# Allegro board WCSA_SystemSchem_2-Layer.brd
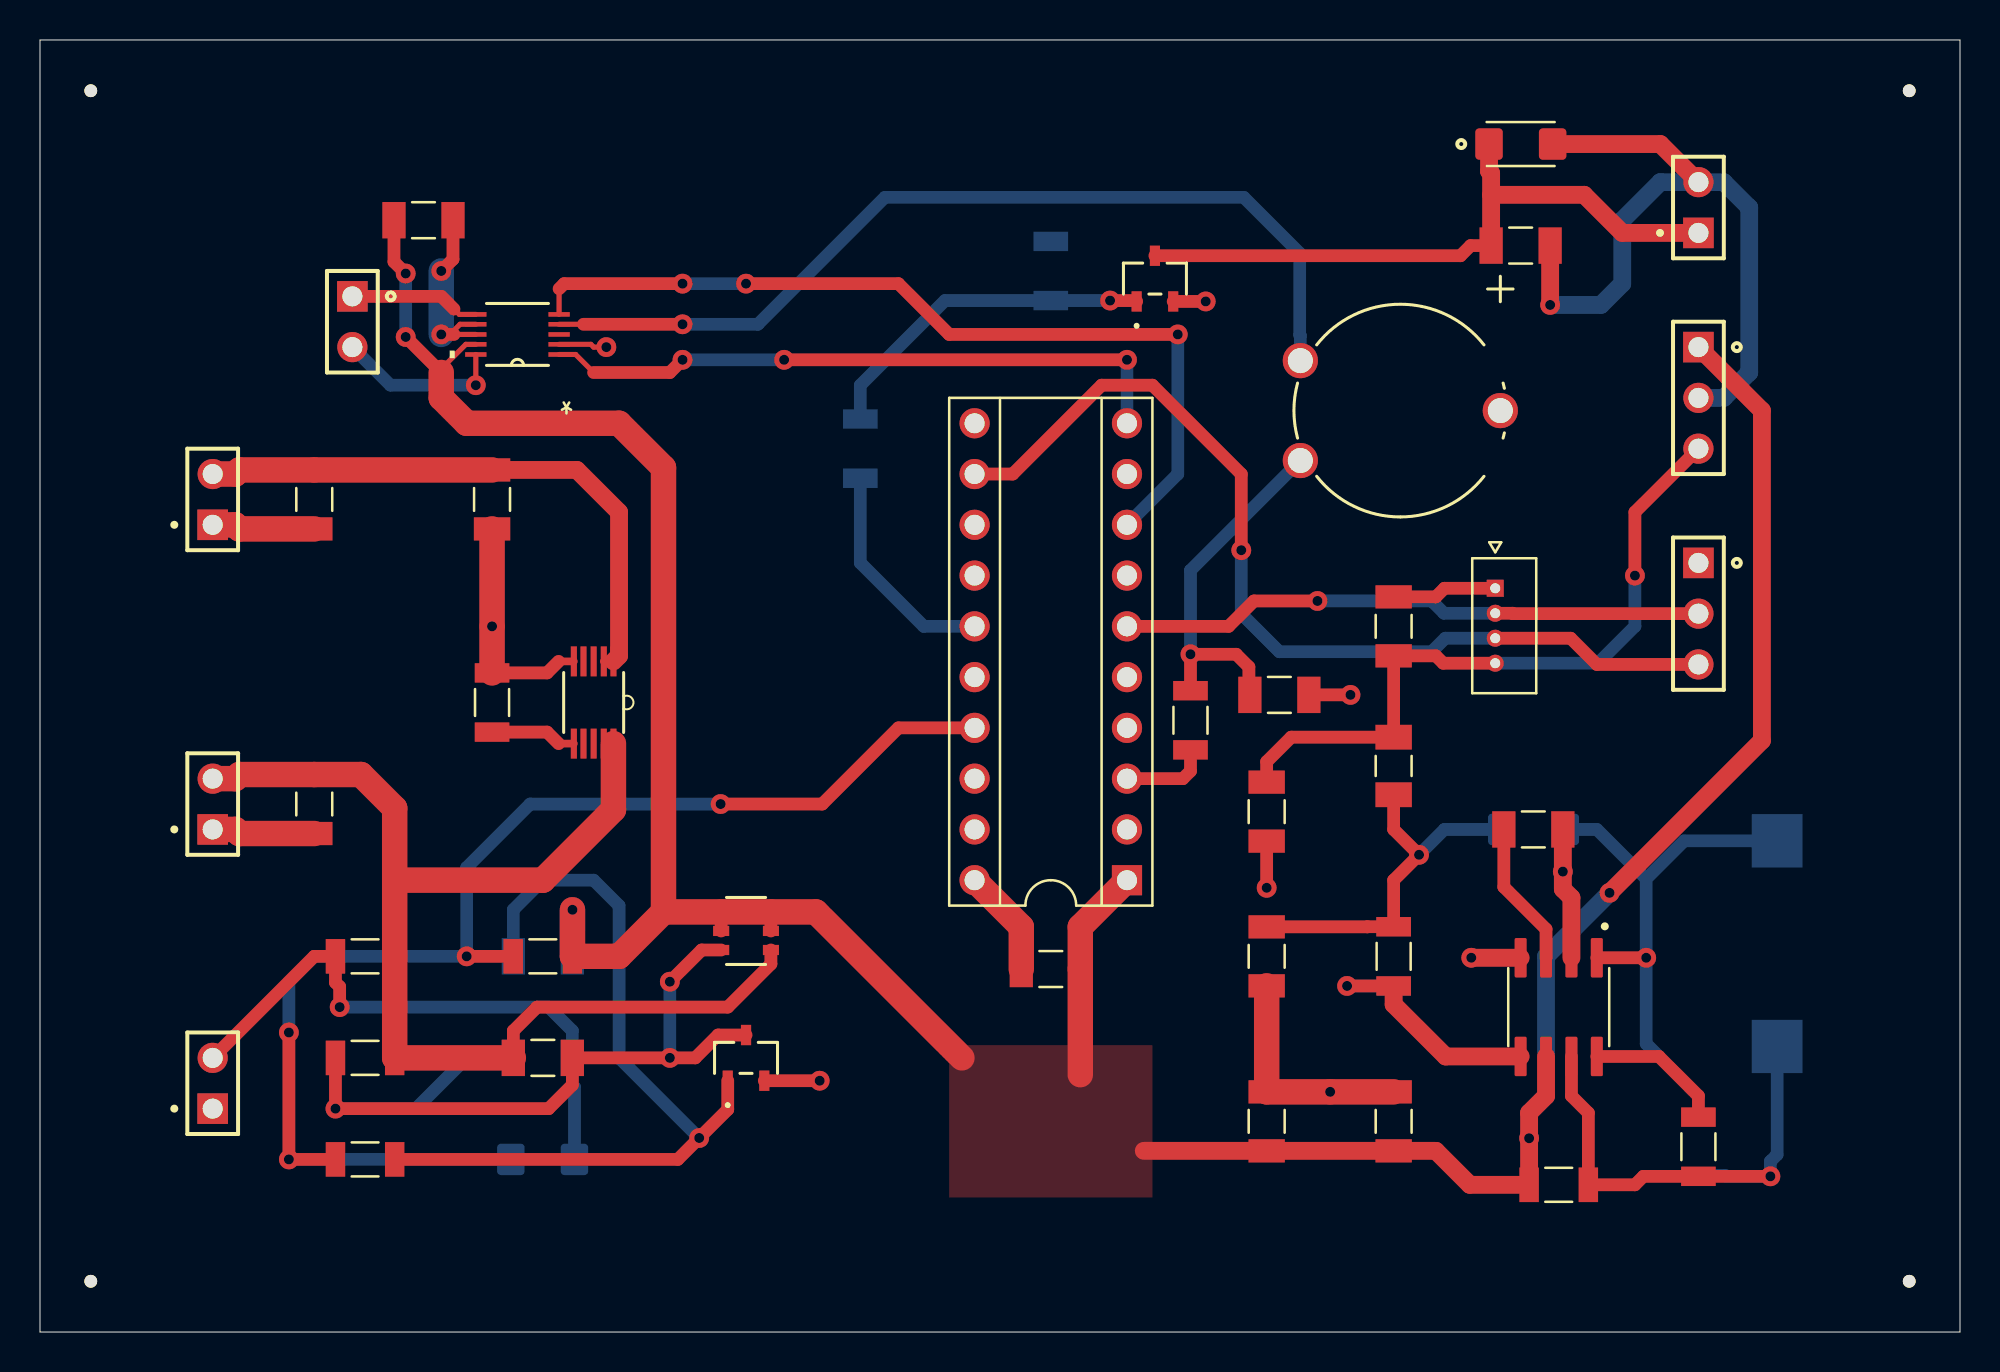
[diagram p0: board, top side]
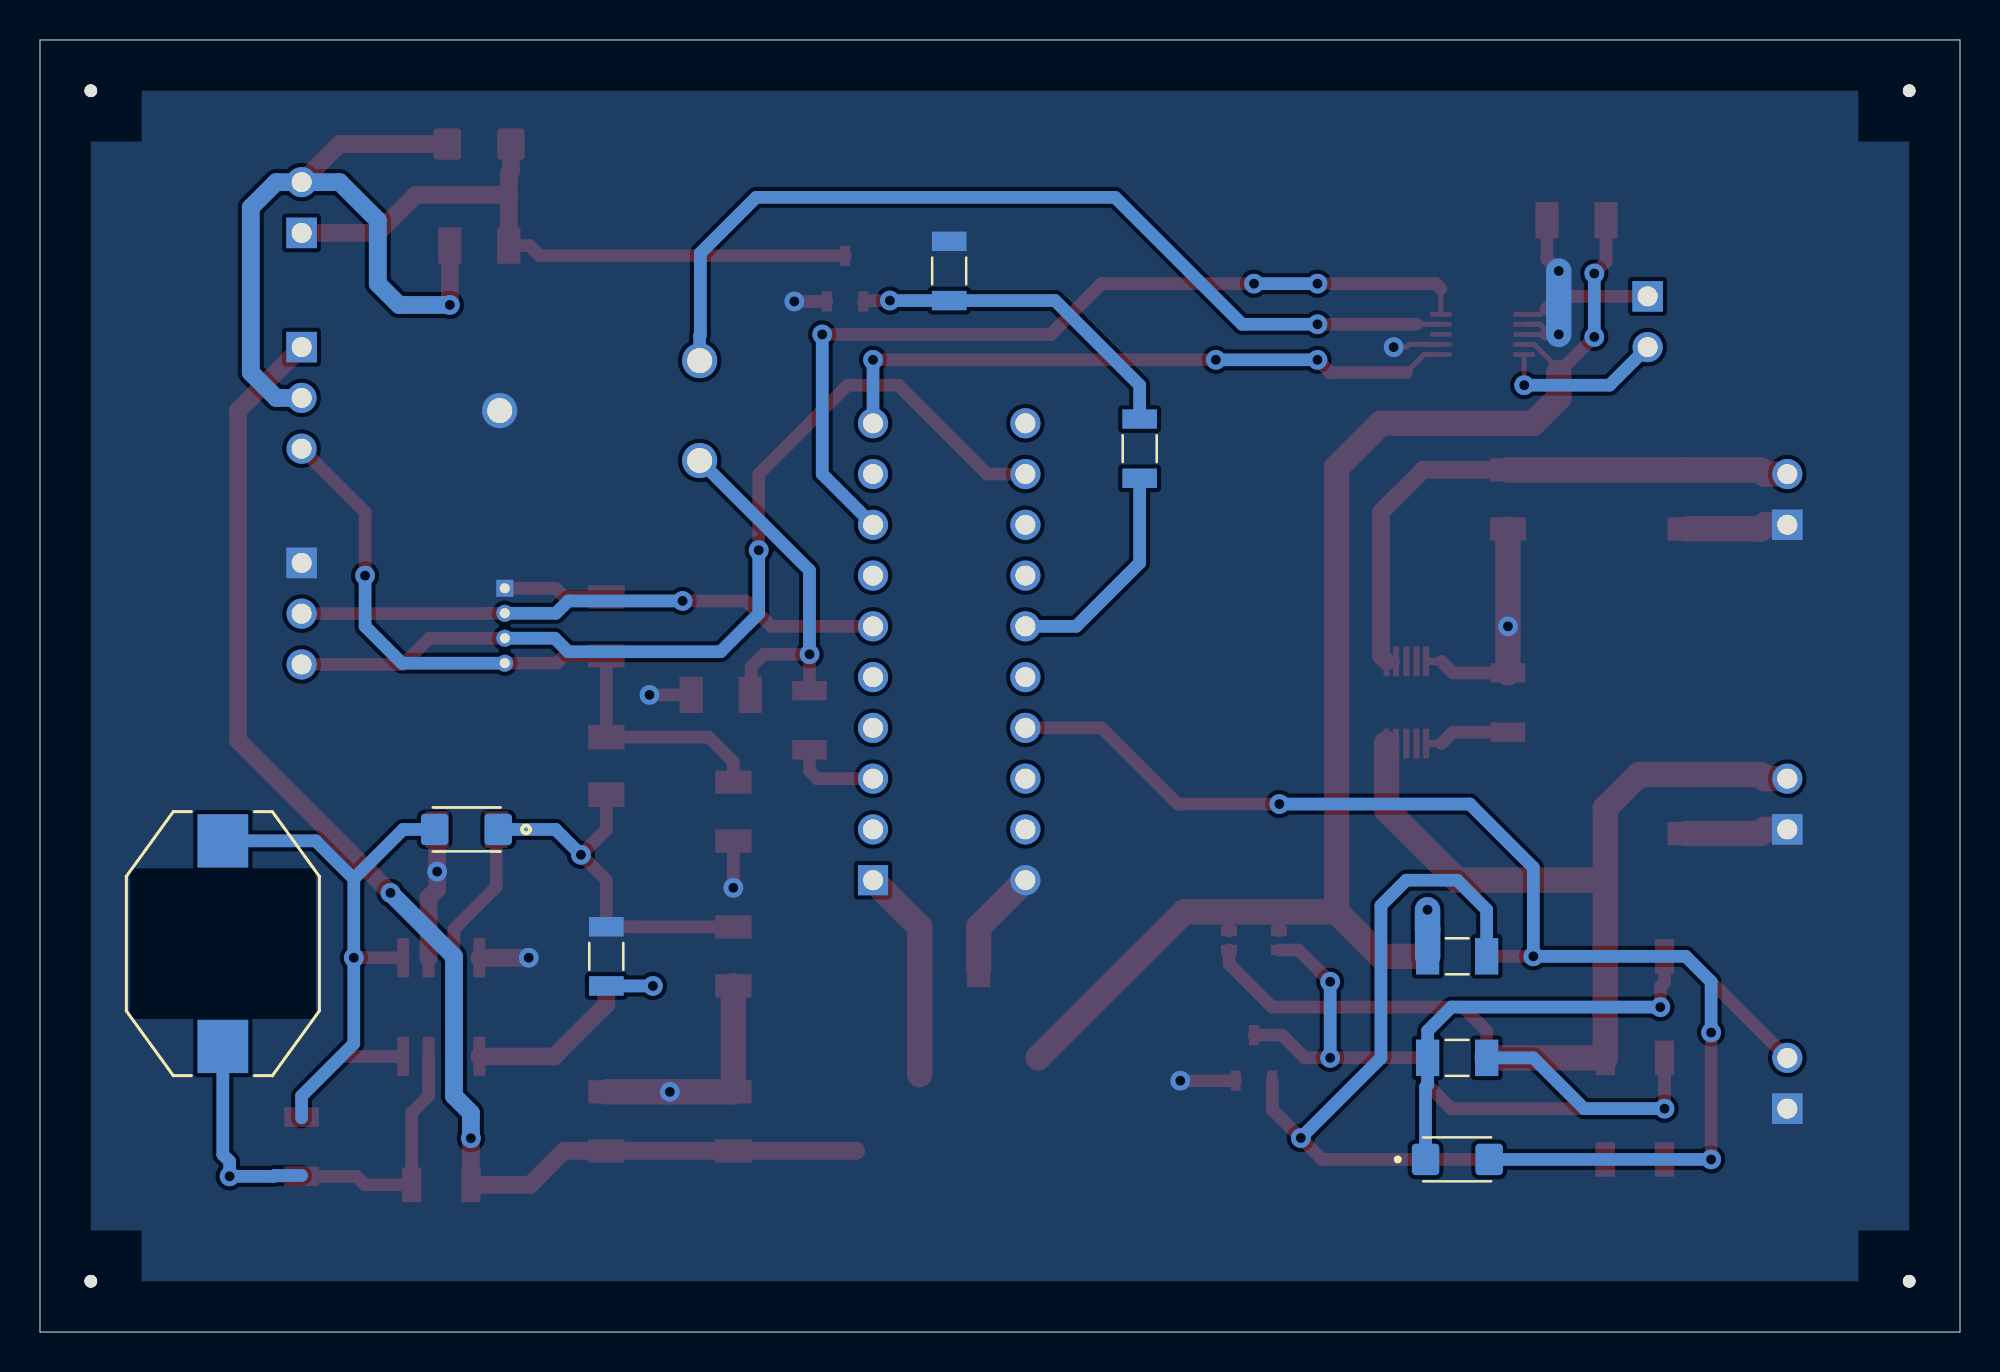
[diagram p1: board, bottom side, seen from below]

Outline 96.01 x 64.64 mm; copper layers: TOP, BOTTOM. Coordinates in mm from the lower left corner of the outline.
Outline path: 0,64.64 96.01,64.64 96.01,0 0,0 0,64.64

## Design rules (mm)
constraint set DEFAULT: min track width 0.305

## Placement (name value [footprint] x y rotation side)
C1  100n  [CAPC3216X110N]  50.55 18.16 0 top
C2  10u  [CAPC3216X110N]  13.72 41.66 270 top
C3  10u  [CAPC3216X110N]  13.72 26.42 270 top
C4  100u  [CAPC3216X110N]  61.34 10.54 90 top
C5  1500p  [CAPC3216X110N]  74.68 25.15 0 top
C6  330u  [CAPC3216X110N]  61.34 18.8 270 top
C7  100n  [CAPC3216X110N]  22.61 41.66 270 top
C8  100n  [CAPC3216X110N]  67.69 10.54 90 top
C9  100n  [CAPC3216X110N]  25.15 13.72 0 top
C10  2.2u  [CAPC3216X110N]  25.15 18.8 180 bottom
C11  1u  [CAPC3216X110N]  25.15 13.72 180 bottom
C12  100n  [CAPC3216X110N]  74.04 54.36 180 top
C13  100n  [CAPC3216X110N]  61.98 31.88 0 top
C14  100n  [CAPC3216X110N]  67.69 35.31 90 top
C15  100u  [CAPC3216X110N]  61.34 26.04 270 top
C16  100n  [CAPC3216X110N]  19.18 55.63 0 top
D1  1N4001  [DIOSC190X340X116-2N]  25.15 8.64 180 bottom
D2  1N5819  [DIOSC190X340X116-2N]  74.68 25.15 0 bottom
D3  1N5819  [DIOSC190X340X116-2N]  74.04 59.44 0 top
J1  PWR_IN  [SAMTEC_MTSW-101-08-S-D-315]  8.64 40.39 0 top
J2  3.7V Li+Po  [SAMTEC_MTSW-101-08-S-D-315]  8.64 25.15 0 top
J3  UART_Header  [SAMTEC_TSW-101-24-G-T]  82.93 38.48 180 top
J4  LiDAR Header  [MOLEX_530470410]  72.77 37.21 90 top
J5  Vibration_Motor  [SAMTEC_MTSW-101-08-S-D-315]  82.93 54.99 0 top
J6  Jumper: +[3.3/5]V  [SAMTEC_TSW-101-24-G-T]  82.93 49.28 180 top
J7  Speaker  [SAMTEC_MTSW-101-08-S-D-315]  15.62 51.82 180 top
L1  170uH  [IND_SMT_DO3316P_12P95X9P4_COC]  86.87 19.43 90 bottom
L2  1uH  [INDC3216X95N]  67.69 28.32 90 top
NOREF  -  [unnamed]  2.54 62.1 0 top
NOREF#2  -  [unnamed]  93.47 62.1 0 top
NOREF#3  -  [unnamed]  2.54 2.54 0 top
NOREF#4  -  [unnamed]  93.47 2.54 0 top
Q1  ZXMD63P02X/ZTX  [ZXM62P02E6TA_DIO]  35.31 20.07 0 top
Q2  ZXMD63N02X/ZTX  [SOT23_2P9X1P3_DIO]  35.31 13.72 0 top
Q3  ZXMD63N02X/ZTX  [SOT23_2P9X1P3_DIO]  55.75 52.7 0 top
R1  10k  [RESC3116X65N]  16.26 18.8 0 top
R2  100k  [RESC3116X65N]  16.26 13.72 0 top
R3  300k  [RESC3116X65N]  16.26 8.64 0 top
R4  100k  [RESC3116X65N]  25.15 18.8 0 top
R5  0.22  [RESC3116X65N]  75.95 7.37 0 top
R6  180  [RESC3116X65N]  82.93 9.27 270 top
R7  3.6k  [RESC3116X65N]  67.69 18.8 270 top
R8  1.2k  [RESC3116X65N]  67.69 18.8 270 bottom
R9  2k  [RESC3116X65N]  22.61 31.5 270 top
R10  1k  [RESC3116X65N]  41.02 44.2 270 bottom
R11  100k  [RESC3116X65N]  50.55 53.09 90 bottom
R12  4.7k  [RESC3116X65N]  57.53 30.61 270 top
R13  T100k  [TO_-102A2020-S_PHR]  73.03 46.1 270 top
SW1  Jump2  [SAMTEC_MTSW-101-08-S-D-315]  8.64 11.18 0 top
U1  PIC16F18345  [DIP-20-SOCKET]  50.55 34.04 90 top
U2  MCP7388T  [SOP50P490X110-10N]  27.69 31.5 270 top
U3  MC3x063A  [SOIC127P599X175-8N]  75.95 16.26 270 top
U4  LM4667  [MUB10A]  23.88 49.91 180 top

## Library data of the parts
C1-C16 = C1206C241MGGACAUTO7210_2
D1-D3 = 1N5819
J1 J2 J5 J7 SW1 = Jump2_0
J3 J6 = SIPSOC-3_1
J4 = SIPSOC-4_0
L1 = L: User Part Number: PN; Tolerance: TOL
L2 = L
Q1 = DIPSOC-3x2_1: User Part Number: PN; Tolerance: TOL
Q2 Q3 = ZXMD63N02X/ZTX: User Part Number: PN; Tolerance: TOL
R1-R12 = RC1206JR-0713RL
R13 = POT_2: User Part Number: PN; Tolerance: TOL
U1 = DIP-20_1
U2 = DIPSOC-5x2_2
U3 = MC3x063A_8
U4 = DIPSOC-5x2_3: User Part Number: PN; Tolerance: TOL

## Footprints (pads in the part's own frame, mm; a bottom-side part is the same pattern mirrored in y, then rotated)
CAPC3216X110N
  rect 1.161x1.819 smd: 1(-1.476,0) 2(1.476,0)
DIOSC190X340X116-2N
  custom 1.372x1.57 smd: 1(-1.58,0) 2(1.6,0)
DIP-20-SOCKET
  rect 1.509x1.509 hole 1.001: 1(-11.43,-3.81)
  round 1.509 hole 1.001: 2(-8.89,-3.81) 3(-6.35,-3.81) 4(-3.81,-3.81) 5(-1.27,-3.81) 6(1.27,-3.81) 7(3.81,-3.81) 8(6.35,-3.81) 9(8.89,-3.81) 10(11.43,-3.81) 11(11.43,3.81) 12(8.89,3.81) 13(6.35,3.81) 14(3.81,3.81) 15(1.27,3.81) 16(-1.27,3.81) 17(-3.81,3.81) 18(-6.35,3.81) 19(-8.89,3.81) 20(-11.43,3.81)
IND_SMT_DO3316P_12P95X9P4_COC
  rect 2.667x2.54 smd: 1(-5.144,0) 2(5.144,0)
INDC3216X95N
  rect 1.24x1.819 smd: 1(-1.44,0) 2(1.44,0)
MOLEX_530470410
  rect 0.851x0.851 hole 0.5: 1(0,0)
  round 0.851 hole 0.5: 2(-1.25,0) 3(-2.499,0) 4(-3.749,0)
MUB10A
  rect 1.067x0.229 smd: 1(-2.083,1.003) 2(-2.083,0.495) 3(-2.083,0) 4(-2.083,-0.508) 5(-2.083,-1.003) 6(2.083,-1.003) 7(2.083,-0.508) 8(2.083,0) 9(2.083,0.495) 10(2.083,1.003)
RESC3116X65N
  rect 0.97x1.73 smd: 1(-1.481,0) 2(1.481,0)
SAMTEC_MTSW-101-08-S-D-315
  rect 1.529x1.529 hole 1.001: 1(0,0)
  round 1.509 hole 1.001: 2(0,2.54)
SAMTEC_TSW-101-24-G-T
  rect 1.529x1.529 hole 1.001: 1(0,0)
  round 1.509 hole 1.001: 2(0,2.54) 3(0,5.08)
SOIC127P599X175-8N
  custom 1.971x0.599 smd: 1(-2.469,1.905) 2(-2.469,0.635) 3(-2.469,-0.635) 4(-2.469,-1.905) 5(2.469,-1.905) 6(2.469,-0.635) 7(2.469,0.635) 8(2.469,1.905)
SOP50P490X110-10N
  rect 1.499x0.305 smd: 1(-2.057,0.991) 2(-2.057,0.508) 3(-2.057,0) 4(-2.057,-0.508) 5(-2.057,-0.991) 6(2.057,-0.991) 7(2.057,-0.508) 8(2.057,0) 9(2.057,0.508) 10(2.057,0.991)
SOT23_2P9X1P3_DIO
  rect 0.508x1.016 smd: 1(0.914,-1.143) 2(-0.914,-1.143) 3(0,1.143)
TO_-102A2020-S_PHR
  round 1.758 hole 1.25: 1(0,0) 2(-2.499,-10) 3(2.499,-10)
unnamed
  round 0.635 hole 3.175 unplated: (0,0)
ZXM62P02E6TA_DIO
  rect 0.803x0.508 smd: 1(-1.245,0.953) 2(-1.245,0) 3(-1.245,-0.953) 4(1.245,-0.953) 5(1.245,0) 6(1.245,0.953)

## Nets
+5V: C14.1 C15.1 J4.4 J6.3 L2.2
GND: C1.1 C2.2 C3.2 C4.2 C5.2 C6.2 C7.2 C8.2 C13.2 C14.2 C15.2 C16.2 J1.1 J2.1 J3.1 J4.1 Q2.1(S) Q3.1(S) R8.1 R9.1 R11.2 R13.1 SW1.1 U1.20 U2.5(VSS) U3.2 U3.4 U4.2 U4.7 U4.8
VBAT: C3.1 C9.1 J2.2(PIN2) Q1.4(S) R1.2 R2.2 U2.9 U2.10
VDD: C1.2 C4.1 C8.1 C10.1 C16.1 J6.1 Q1.1 Q1.2 Q1.5 Q1.6 R4.2 R5.1 U1.1 U3.6(VCC) U4.9
RA2-CCP3: D1.2 R3.1 R4.1 U1.17
RA4-CCP4: R12.2 U1.3
RB5-RX: J3.3 J4.3 U1.12
RB7-SPKR_SD: U1.10 U4.1
RC1-PWM5: R10.2 U1.15
RC4-TX: J3.2 J4.2 U1.6
RC6-SPKR_G: U1.8 U4.5
VCHG: C2.1 C7.1 J1.2(PIN2) U2.1 U2.2
N11607: R9.2 U2.6
N12112: L1.1 R5.2 R6.2 U3.7
N12132: D2.2 L1.2 U3.1
N12244: C6.1 D2.1(CAT) L2.1 R7.1
N12286: R7.2 R8.2 U3.5
N14206: C5.1 U3.3
N88931: C9.2 C11.2 Q1.3 Q2.3 R2.1
N88985: C10.2 Q2.2 R3.2
N92811: C11.1 D1.1(CAT) R1.1 SW1.2(PIN2)
N99325: Q3.2 R10.1 R11.1
N99590: C12.2 D3.1(CAT) J5.1 Q3.3
N99769: C12.1 D3.2 J5.2(PIN2) J6.2
N102392: C13.1 R12.1 R13.3
N102677: R13.2(WIPER) U4.4
N102956: J7.2(PIN2) U4.10(VO2)
N102965: J7.1 U4.6
N121987: R6.1 U3.8

Pads without a net: U1 2 4 5 7 9 11 13 14 16 18 19; U2 3 4 7 8; U4 3

## Via types
v1: diameter 0.991, hole 0.5, TOP to BOTTOM, 43 vias

## Routing (per net, layer and track width the routed paths; a pad name or vN(x,y) marks a point on that pad's centre or on a via; arc(x,y) is an arc through that point)
+5V: length 35.1
  TOP w0.635: J6.3 79.76,41.02 v1(79.76,37.85) ; C15.1 61.34,28.53 62.57,29.76 L2.2 C14.1 69.8,33.83 70.17,33.46 J4.4
  BOTTOM w0.635: J4.4 77.91,33.46 79.76,35.31 v1(79.76,37.85)
GND: length 73.6
  TOP w0.254: v1(28.32,49.28) 27.69,49.28 27.55,49.42 U4.2 ; 21.79,49.91 20.7,49.91 20.7,50.11 21.01,50.42 21.79,50.42
  TOP w0.381: 25.93,33.55 U2.5
  TOP w0.635: J4.1 70.23,37.21 69.8,36.78 C14.2 ; R9.1 25.36,32.98 25.93,33.55 ; Q3.1 v1(58.29,51.56) ; Q2.1 v1(38.99,12.57) ; C13.2 v1(65.53,31.88) ; C15.2 v1(61.34,22.22) ; C16.2 20.65,53.67 v1(20.07,53.09) ; v1(20.07,49.91) 20.7,49.91
  TOP w0.889: C5.2 v1(76.15,23.04) 76.15,22.16 76.58,21.73 U3.2 ; U3.4 v1(71.57,18.72)
  TOP w1.27: J2.1 9.77,25.15 9.97,24.94 C3.2 ; C2.2 9.97,40.18 9.77,40.39 J1.1 ; R9.1 v1(22.61,35.31) C7.2 ; C1.1 49.07,20.27 U1.20 ; C6.2 C4.2 v1(64.52,12.02) C8.2
  BOTTOM w1.27: v1(20.07,49.91) v1(20.07,53.09)
VBAT: length 60.8
  TOP w0.254: U2.9 U2.10
  TOP w0.635: C9.1 23.67,15.07 24.86,16.26 34.39,16.26 36.55,18.41 Q1.4
  TOP w1.27: 17.74,22.61 17.74,26.21 16.05,27.89 C3.1 9.97,27.89 9.77,27.69 J2.2 ; 17.74,22.61 R1.2 R2.2 C9.1 ; 17.74,22.61 25.15,22.61 28.68,26.14 U2.10
VDD: length 160.2
  TOP w0.254: 20.07,48.01 20.07,48.19 21.3,49.42 U4.9
  TOP w0.635: Q1.6 Q1.5 ; C16.1 17.7,53.55 v1(18.29,52.96) ; 20.07,48.01 v1(18.29,49.78) ; Q1.2 Q1.1
  TOP w0.889: 55.2,9.07 C4.1 C8.1 69.8,9.07 71.5,7.37 R5.1 v1(74.47,9.7) 74.47,10.97 75.31,11.81 U3.6 ; J6.1 86.11,46.1 86.11,29.59 v1(78.49,21.97)
  TOP w1.27: U1.1 52.02,20.27 C1.2 52.02,12.88 ; v1(26.63,21.13) R4.2 28.96,18.8 31.18,21.02 ; 31.18,21.02 31.18,43.24 28.96,45.47 21.34,45.47 20.07,46.74 20.07,48.01 ; 31.18,21.02 Q1.1 Q1.6 38.8,21.02 46.1,13.72
  BOTTOM w0.635: v1(18.29,49.78) v1(18.29,52.96)
  BOTTOM w0.889: v1(74.47,9.7) 74.47,10.97 75.31,11.81 75.31,18.8 v1(78.49,21.97)
  BOTTOM w1.27: v1(26.63,21.13) 26.63,20.15 26.62,20.15 C10.1
RA2-CCP3: length 66.8
  TOP w0.635: R3.1 v1(12.45,8.64) v1(12.45,14.99) ; v1(34.04,26.42) 39.12,26.42 42.93,30.23 U1.17 ; v1(21.34,18.8) R4.1
  BOTTOM w0.635: v1(12.45,14.99) 12.45,17.53 13.72,18.8 v1(21.34,18.8) 21.34,23.24 24.51,26.42 v1(34.04,26.42) ; D1.2 v1(12.45,8.64)
RA4-CCP4: length 4.4
  TOP w0.635: U1.3 57.15,27.69 57.53,28.07 R12.2
RB5-RX: length 48.5
  TOP w0.635: U1.12 48.64,42.93 53.09,47.37 55.63,47.37 60.07,42.93 v1(60.07,39.12) ; 82.93,33.4 77.85,33.4 76.54,34.71 J4.3
  BOTTOM w0.635: v1(60.07,39.12) 60.07,35.94 61.98,34.04 69.6,34.04 70.27,34.71 J4.3
RB7-SPKR_SD: length 32.2
  TOP w0.254: U4.1 26.78,48.91 27.69,48.01
  TOP w0.635: v1(32.13,48.64) 31.5,48.01 27.69,48.01 ; v1(37.21,48.64) v1(54.36,48.64)
  BOTTOM w0.635: v1(32.13,48.64) v1(37.21,48.64) ; v1(54.36,48.64) U1.10
RC1-PWM5: length 11.3
  BOTTOM w0.635: R10.2 41.02,38.48 44.2,35.31 U1.15
RC4-TX: length 29.4
  TOP w0.635: J3.2 73.66,35.94 73.64,35.96 J4.2 ; U1.6 59.44,35.31 60.71,36.58 v1(63.88,36.58)
  BOTTOM w0.635: v1(63.88,36.58) 69.6,36.58 70.21,35.96 J4.2
RC6-SPKR_G: length 44
  TOP w0.254: U4.5 25.96,52.2
  TOP w0.635: v1(32.13,52.45) 26.21,52.45 25.96,52.2 ; v1(56.9,49.91) 45.47,49.91 42.93,52.45 v1(35.31,52.45)
  BOTTOM w0.635: U1.8 56.9,42.93 v1(56.9,49.91) ; v1(32.13,52.45) v1(35.31,52.45)
VCHG: length 29.3
  TOP w0.381: U2.1 U2.2
  TOP w0.889: U2.1 28.96,33.83 28.96,41.02 26.85,43.13 C7.1
  TOP w1.27: C7.1 C2.1 9.97,43.13 9.77,42.93 J1.2
N11607: length 4.3
  TOP w0.381: 25.93,29.44 U2.6
  TOP w0.635: R9.2 25.36,30.02 25.93,29.44
N12112: length 26.3
  TOP w0.635: v1(86.53,7.79) R6.2 80.18,7.79 79.76,7.37 R5.2 77.43,10.97 76.58,11.81 U3.7
  BOTTOM w0.635: L1.1 86.87,8.88 86.53,8.54 v1(86.53,7.79) 84.33,7.79 84.28,7.83 82.93,7.83
N12132: length 27.9
  TOP w0.635: U3.1 v1(80.32,18.72)
  BOTTOM w0.635: L1.2 82.22,24.57 80.32,22.68 ; D2.2 77.85,25.15 80.32,22.68 ; 80.32,22.68 v1(80.32,18.72) 80.32,14.42 82.93,11.81 82.93,10.71
N12244: length 18.7
  TOP w0.635: L2.1 67.69,25.15 v1(68.96,23.88) 67.69,22.61 R7.1 66.38,20.28 66.38,20.27 C6.1
  BOTTOM w0.635: v1(68.96,23.88) 70.23,25.15 D2.1
N12286: length 13
  TOP w0.635: R7.2 v1(65.36,17.32)
  TOP w0.889: U3.5 70.29,13.79 67.69,16.39 R7.2
  BOTTOM w0.635: v1(65.36,17.32) R7.2
N14206: length 7.3
  TOP w0.635: C5.1 73.2,22.27 75.31,20.15 U3.3
N88931: length 42.4
  TOP w0.635: Q1.3 33.08,19.11 v1(31.5,17.53) ; Q2.3 33.91,14.86 32.77,13.72 v1(31.5,13.72) C9.2 26.62,12.36 25.44,11.18 v1(14.78,11.18) R2.1
  BOTTOM w0.635: v1(14.78,11.18) 18.8,11.18 21.34,13.72 C11.2 ; v1(31.5,13.72) v1(31.5,17.53)
N88985: length 41.2
  TOP w0.635: Q2.2 34.39,11.13 v1(32.96,9.71) 31.89,8.64 R3.2
  BOTTOM w0.635: C10.2 23.67,21.13 25.15,22.61 27.69,22.61 28.96,21.34 28.96,13.72 v1(32.96,9.71)
N92811: length 29.5
  TOP w0.635: SW1.2 13.72,18.8 R1.1 14.78,17.49 14.99,17.28 v1(14.99,16.26)
  BOTTOM w0.635: v1(14.99,16.26) 25.44,16.26 26.62,15.07 C11.1 26.62,12.36 26.73,12.26 D1.1
N99325: length 17.3
  TOP w0.635: v1(53.51,51.61) 54.8,51.61 Q3.2
  BOTTOM w0.635: v1(53.51,51.61) R11.1 45.26,51.61 41.02,47.37 R10.1
N99590: length 33.3
  TOP w0.635: Q3.3 71.03,53.85 71.54,54.36 C12.2
  TOP w0.889: D3.1 72.46,58.08 72.57,57.98 72.57,56.9 ; 72.57,56.9 77.22,56.9 79.12,54.99 J5.1 ; 72.57,56.9 C12.2
N99769: length 37.3
  TOP w0.889: C12.1 v1(75.52,51.39) ; D3.2 81.03,59.44 J5.2
  BOTTOM w0.889: v1(75.52,51.39) 78.06,51.39 79.12,52.45 79.12,55.63 81.03,57.53 J5.2 84.2,57.53 85.47,56.26 85.47,48.01 84.2,46.74 J6.2
N102392: length 18.4
  TOP w0.635: R12.1 v1(57.53,33.91) 59.82,33.91 60.45,33.27 60.45,31.93 C13.1
  BOTTOM w0.635: v1(57.53,33.91) 57.53,38.11 R13.3
N102677: length 46.2
  TOP w0.254: U4.4 27.18,50.42
  TOP w0.635: 27.18,50.42 v1(32.13,50.42)
  BOTTOM w0.635: R13.2 63.03,49.84 62.99,49.88 62.99,53.98 60.2,56.77 42.25,56.77 35.9,50.42 v1(32.13,50.42)
N102956: length 8.5
  TOP w0.254: U4.10 v1(21.79,47.37)
  BOTTOM w0.635: J7.2 17.53,47.37 v1(21.79,47.37)
N102965: length 6.5
  TOP w0.254: 20.7,51.18 20.97,50.91 U4.6
  TOP w0.635: 20.7,51.18 20.07,51.82 J7.1
N121987: length 7
  TOP w0.635: U3.8 80.95,13.79 82.93,11.81 R6.1

## Copper pours and planes (outline as drawn; the poured copper is in the pictures)
GND on BOTTOM: 93.47,62.1 93.47,2.54 2.54,2.54 2.54,62.1
VDD on TOP: 45.47,14.35 45.47,6.73 55.63,6.73 55.63,14.35

## Text on the board
USER_PART_NUM_TOP: FIGURE | SIZE | 19.69 | 19.7 | 39.4 | 49.2 | 125.0 | DRILL CHART: TOP to BOTTOM | ALL UNITS ARE IN MILS | PLATED | NON-PLATED | QTY | 1 | 43 | 3 | 36 | 4
